# Altium PCB jfino-hw.PcbDoc
Units mm, origin at the board's own origin, x right, y up, seen from the top; angles counter-clockwise.
Board outline 100 x 100 mm, 2 copper layers (Top Layer, Bottom Layer), stack 1.57 mm thick; 123 components, 90 nets, 385 pads, 95 vias.
Unrouted connection lines stored in the file: 51.
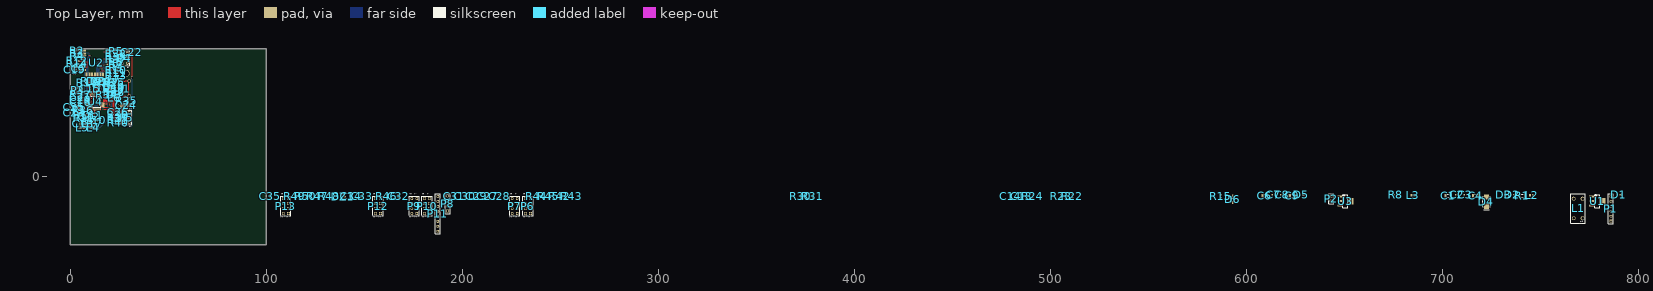
[diagram p0: Top Layer view]
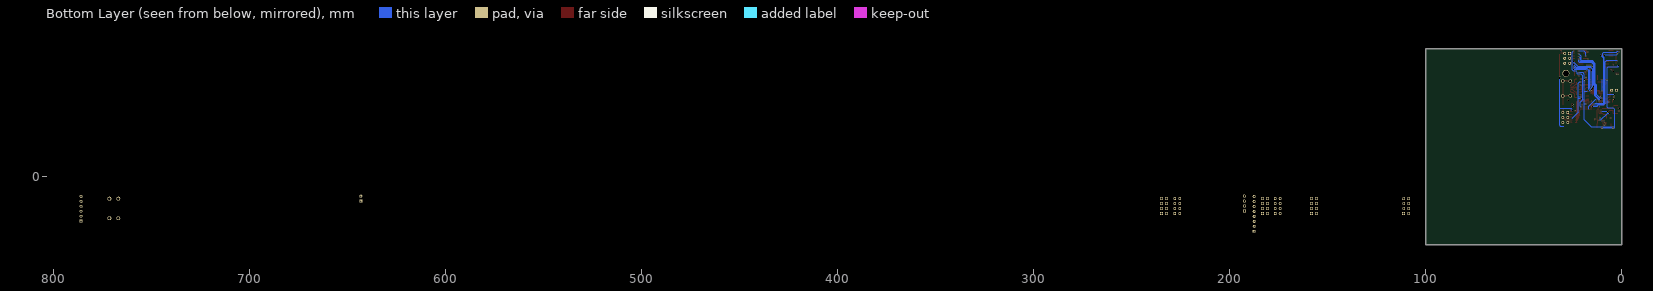
[diagram p1: Bottom Layer view, seen from below]

## Layer stack, top to bottom
Top Solder: solder mask 0.01, Dk 0
Top Layer: signal copper 0.035
Core: core 1.5, Dk 0
Bottom Layer: signal copper 0.035
Bottom Solder: solder mask 0.01, Dk 0

## Board outline
0,65.3 100,65.3 100,-34.7 0,-34.7

## Design rules (kind name [scope] priority, off if disabled: settings)
Clearance Clearance_U4 [(ObjectKind = 'Pad') And (Component = 'U4')] p1: gap=0.24 ignorepadtopadclearanceinfootprint=FALSE
Clearance [All] p2: gap=0.254 ignorepadtopadclearanceinfootprint=FALSE except(0: Arc-Hole Track-Hole SMDPad-Hole THPad-Hole Via-Hole Fill-Hole Poly-Hole Region-Hole Text-Hole)
PolygonConnect [All] p1: connectstyle=Relief reliefconductorwidth=0.254 reliefentries=4 polygonreliefangle="90 Angle" airgapwidth=0.254
RoomDefinition jfino-hw [InComponentClass('jfino-hw')] p1: confinementstyle=ConfineIn formatcopy=TRUE lockcomponents=FALSE outline 101.25,-33.2 791.998,-33.2 791.998,-5.7 101.25,-5.7
RoutingVias [All] p1: holewidth=0.3 width=0.6 viastyle="Through Hole" minholewidth=0.3 minwidth=0.6 maxholewidth=0.3 maxwidth=0.6
SolderMaskExpansion [All] p1: expansion=0.102
Width [All] p1: maxlimit=1 minlimit=0.2 preferedwidth=0.508
30 further rules are at their usual default settings.

## Components (designator, comment, footprint, x,y, rotation, side; value= is the part's Value field where it differs from the comment)
C1 "47uF" 1206_[3216] 702.998,-9.7 r0 top value=10nF
C2 "100nF" 0603_[1608] 707.498,-9.2 r0 top value=10nF
C3 "100nF" 0603_[1608] 711.748,-9.2 r0 top value=10nF
C4 "47uF" 1206_[3216] 716.998,-9.7 r0 top value=10nF
C5 "100nF" 0603_[1608] 4.4,55.1 r90 top value=10nF
C6 "47uF" 1206_[3216] 609.499,-9.7 r0 top value=10nF
C7 "100nF" 0603_[1608] 613.999,-9.2 r0 top value=10nF
C8 "100nF" 0603_[1608] 618.249,-9.2 r0 top value=10nF
C9 "47uF" 1206_[3216] 623.499,-9.7 r0 top value=10nF
C10 "100nF" 0603_[1608] 13.1,28.7 r180 top value=10nF
C11 "100nF" 0603_[1608] 11.4,31.3 r90 top value=10nF
C12 "10uF" 1206_[3216] 9.65,30.55 r90 top value=10nF
C13 "100nF" 0603_[1608] 485.499,-9.95 r90 top value=10nF
C14 "100nF" 0603_[1608] 479.749,-9.95 r90 top value=10nF
C15 "100nF" 0603_[1608] 10.15,45 r270 top value=10nF
C16 "100nF" 0603_[1608] 5.325,38.05 r0 top value=10nF
C17 "10uF" 1206_[3216] 11.1,26.95 r0 top value=10nF
C18 "10uF" 1206_[3216] 6.65,26.95 r180 top value=10nF
C19 "10uF" 1206_[3216] 2.25,54.55 r90 top value=10nF
C20 "100nF" 0603_[1608] 5.325,39.3 r0 top value=10nF
C21 "100nF" 0603_[1608] 5.325,40.55 r0 top value=10nF
C22 "100nF" 0603_[1608] 31.45,63.475 r90 top value=10nF
C23 "6.8pF" 0603_[1608] 2.1,32.75 r90 top value=10nF
C24 "NP" 1808_[4520] 28.47,36.33 r0 top value=10nF
C25 "6.8pF" 0603_[1608] 2.1,35.5 r270 top value=10nF
C26 "100nF" 0603_[1608] 24.6,33 r180 top value=10nF
C27 "100nF" 0603_[1608] 212.999,-9.95 r90 top value=10nF
C28 "100nF" 0603_[1608] 218.999,-9.95 r90 top value=10nF
C29 "100nF" 0603_[1608] 207.249,-9.95 r90 top value=10nF
C30 "100nF" 0603_[1608] 201.499,-9.95 r90 top value=10nF
C31 "100nF" 0603_[1608] 195.999,-9.95 r90 top value=10nF
C32 "100nF" 0603_[1608] 167.499,-9.95 r90 top value=10nF
C33 "100nF" 0603_[1608] 148.999,-9.95 r90 top value=10nF
C34 "100nF" 0603_[1608] 143.249,-9.95 r90 top value=10nF
C35 "100nF" 0603_[1608] 102,-9.95 r90 top value=10nF
D1 "Diode" 0603_[1608]_K1-A2_LED 789.998,-9.2 r0 top
D2 "Diode" 0603_[1608]_K1-A2_LED 735.748,-9.2 r0 top
D3 "LED_5V" 0603_[1608]_K1-A2_LED 731.248,-9.2 r0 top
D4 "SMBJ18A" DO214AA_K1-A2_SMB 722.498,-12.7 r90 top
D5 "LED_3V3" 0603_[1608]_K1-A2_LED 627.999,-9.2 r0 top
D6 "B0520LW" SOD-123 592.999,-11.45 r90 top
D7 "WB_TX" 0603_[1608]_K1-A2_LED 12.5,48.7 r270 top
D8 "WB_RX" 0603_[1608]_K1-A2_LED 14.3,48.7 r270 top
D9 "CG0603MLC-05" 0603_[1608] 22.4,41.7 r180 top
D10 "CG0603MLC-05" 0603_[1608] 22.4,45.6 r180 top
D11 "CPU_LED" 0603_[1608]_K1-A2_LED 17.4,44.75 r90 top
DZ1 "BZX84C3V6LT1G" SOT-23 139,-10.2 r0 top
J1 "Mini USB Type B" USB_MICRO_B_SMD 28.75,45 r90 top
L1 "4mH" WE-CMB-XS 769.248,-16.2 r90 top
L2 "WE742792022" 0805_[2012] 745.498,-9.45 r0 top
L3 "WE742792022" 0805_[2012] 684.998,-9.45 r0 top
L4 "Inductor" 0805_[2012] 11.65,25.05 r180 top
L5 "Inductor" 0805_[2012] 6.1,25.05 r0 top
L6 "WE742792022" 0805_[2012] 22.4,40.25 r180 top
L7 "WE742792022" 0805_[2012] 22.4,49.75 r0 top
P1 "Power IN" HDR1X6 785.998,-22.7 r90 top
P2 "USB_POWER" HEADER_1X2_2.54MM_THD 643.248,-11.2 r90 top
P3 "RESET" HEADER_1X2_2.54MM_THD 3.875,44.1 r0 top
P4 "JLINK" HEADER_2X3_2.54MM_THD 27.85,60.375 r270 top
P5 "ICSP" HEADER_2X3_2.54MM_THD 28.8,30.2 r270 top
P6 "SONAR_VCC" HEADER_2X4_2.54MM_THD 233.499,-14.95 r90 top
P7 "IR_L" HEADER_2X4_2.54MM_THD 226.749,-14.95 r90 top
P8 "Header 4" HEADER_1X4_2.54MM_THD 192.499,-13.7 r90 top
P9 "MOT_L" HEADER_2X4_2.54MM_THD 175.499,-14.95 r90 top
P10 "MOT_R" HEADER_2X4_2.54MM_THD 181.999,-14.95 r90 top
P11 "IMU" HEADER_1X8_2.54MM_THD 187.499,-18.95 r90 top
P12 "IR_M" HEADER_2X4_2.54MM_THD 156.999,-14.95 r90 top
P13 "IR_R" HEADER_2X4_2.54MM_THD 110,-14.95 r90 top
R1 "0R012" 1206_[3216] 740.748,-9.7 r0 top value=1K
R2 "33R" 0603_[1608] 3.5,64.3 r0 top value=1K
R3 "33R" 0603_[1608] 3.5,62.9 r0 top value=1K
R4 "33R" 0603_[1608] 3.5,61.5 r0 top value=1K
R5 "33R" 0603_[1608] 23.425,64.05 r0 top value=1K
R6 "33R" 0603_[1608] 23.4,58.45 r0 top value=1K
R7 "33R" 0603_[1608] 23.4,57.05 r0 top value=1K
R8 "1k" 0603_[1608] 676.248,-9.2 r0 top value=1K
R9 "33R" 0603_[1608] 23.4,55.65 r0 top value=1K
R10 "33R" 0603_[1608] 23.4,54.25 r0 top value=1K
R11 "47k" 0603_[1608] 23.4,52.875 r180 top value=1K
R12 "NP" 0603_[1608] 3.65,59.05 r0 top value=1K
R13 "NP" 0603_[1608] 23.4,51.5 r180 top value=1K
R14 "47k" 0603_[1608] 3.65,57.65 r0 top value=1K
R15 "1k" 0603_[1608] 586.999,-9.95 r90 top value=1K
R16 "NP" 0603_[1608] 7.15,31.45 r180 top value=1K
R17 "1k" 0603_[1608] 8.7,48.05 r0 top value=1K
R18 "1k" 0603_[1608] 17.95,48.05 r180 top value=1K
R19 "NP" 0603_[1608] 10.9,48.75 r270 top value=1K
R20 "NP" 0603_[1608] 15.9,48.75 r270 top value=1K
R21 "NP" 0603_[1608] 7.2,29.9 r0 top value=1K
R22 "39k" 0603_[1608] 511.249,-9.95 r90 top value=1K
R23 "39k" 0603_[1608] 505.499,-9.95 r90 top value=1K
R24 "10k" 0603_[1608] 490.999,-9.95 r90 top value=1K
R25 "NP" 0603_[1608] 22.4,48.2 r180 top value=1K
R26 "NP" 0603_[1608] 22.4,46.9 r0 top value=1K
R27 "47k" 0603_[1608] 5.325,41.8 r180 top value=1K
R28 "33R" 0603_[1608] 22.4,43 r180 top value=1K
R29 "33R" 0603_[1608] 22.4,44.3 r180 top value=1K
R30 "NP" 0603_[1608] 372.749,-9.95 r90 top value=1K
R31 "NP" 0603_[1608] 378.749,-9.95 r90 top value=1K
R32 "33R" 0603_[1608] 23.4,62.675 r0 top value=1K
R33 "33R" 0603_[1608] 23.4,61.275 r0 top value=1K
R34 "470R" 0603_[1608] 18.7,41.85 r90 top value=1K
R35 "NP" 0805_[2012] 28.75,38.85 r180 top value=1K
R36 "NP" 0603_[1608] 6.65,34 r90 top value=1K
R37 "33R" 0603_[1608] 23.4,59.85 r0 top value=1K
R38 "33R" 0603_[1608] 24.6,31.6 r0 top value=1K
R39 "33R" 0603_[1608] 24.6,30.2 r0 top value=1K
R40 "33R" 0603_[1608] 24.6,27.4 r0 top value=1K
R41 "33R" 0603_[1608] 24.6,28.8 r180 top value=1K
R42 "NP" 0603_[1608] 249.749,-9.95 r90 top value=1K
R43 "0R" 0603_[1608] 255.749,-9.95 r90 top value=1K
R44 "0R" 0603_[1608] 237.999,-9.95 r90 top value=1K
R45 "0R" 0603_[1608] 243.999,-9.95 r90 top value=1K
R46 "330R" 0603_[1608] 161.499,-9.95 r90 top value=1K
R47 "0R" 0603_[1608] 126.25,-9.95 r90 top value=1K
R48 "0R" 0603_[1608] 132,-9.95 r90 top value=1K
R49 "NP" 0603_[1608] 114.5,-9.95 r90 top value=1K
R50 "NP" 0603_[1608] 120.25,-9.95 r90 top value=1K
U1 "LM7805" SOT-223 778.998,-12.45 r0 top
U2 "DW1000" DWM1000 6.75,51.95 r0 top
U3 "LM1117-3V3" SOT-223 650.498,-12.45 r0 top
U4 "SAMD21G" LQFP-48_7x7MM_0.5MM 12.75,38.3 r90 top
Y1 "32.768kHz-SMD" CRYSTAL_4X1.5MM_2P_SMD 4.2,34.05 r270 top

## Footprints (in the part's own frame and the unit in brackets; to place one, negate y for a bottom-side part, rotate by r counter-clockwise, add the part's x,y. Pads: shape width x height; smd on the part's side, far side on the other; paste and mask are expansions set on the pad)
0603_[1608] [mm] "Chip Capacitor, Body 1.6x0.8mm, IPC High Density"
  rect 0.8x0.9 smd: 1(-0.7,0) 2(0.7,0)
  body extent -0.75,-0.4 0.75,0.4, height 0.67
0603_[1608]_K1-A2_LED [mm] "SMD led 0603 size"
  rect 0.8x0.9 smd: 1(0.7,0) 2(-0.7,0)
  silkscreen extent 1.5,-0.5 1.5,0.5, body extent -0.8,-0.4 0.8,0.4, height 0.7
0805_[2012] [mm] "Chip Resistor, Body 2.0x1.2mm, IPC High Density"
  rect 1x1.3 smd: 1(-0.8,0) 2(0.8,0)
  body extent -1,-0.6 1,0.6, height 0.62
1206_[3216] [mm] "Chip Capacitor, Body 3.2x1.6mm, IPC High Density"
  rect 1.1x1.7 smd: 1(-1.35,0) 2(1.35,0)
  silkscreen extent -0.4,-0.75 0.4,0.75, body extent -1.7,-0.9 1.7,0.9, height 1.3
1808_[4520] [mm] "Chip Capacitor; Body 4.5 x 2.0 mm (LxW typ)"
  rect 1.8x2.25 smd: 1(-2.075,0) 2(2.075,0)
  silkscreen extent -0.87,-1.02 0.87,1.02, body extent -2.3,-1 2.3,1, height 1.35
CRYSTAL_4X1.5MM_2P_SMD [mm] "smd crystall"
  rect 1.5x1.9 smd: 1(-1.7,0) 2(1.7,0)
  silkscreen extent -2.7,-1.2 2.7,1.2, body extent -2.05,-0.75 2.05,0.75, height 1
DO214AA_K1-A2_SMB [mil]
  rect 103x108 smd: 1(-92.5,0) 2(92.5,0)
  silkscreen extent -167,-79 108,79, body extent -110,-78 110,78, height 106
DWM1000 [mm]
  rect 2.45x1 smd: 1(0,12.35) 2(0,10.95) 3(0,9.55) 4(0,8.15) 5(0,6.75) 6(0,5.35) 7(0,3.95) 8(0,2.55) 17(13,2.55) 18(13,3.95) 19(13,5.35) 20(13,6.75) 21(13,8.15) 22(13,9.55) 23(13,10.95) 24(13,12.35)
  rect 1x2.45 smd: 9(1.6,0) 10(3,0) 11(4.4,0) 12(5.8,0) 13(7.2,0) 14(8.6,0) 15(10,0) 16(11.4,0)
  body extent 0,0 13,23, height 1
HDR1X6 [mm] "Connector; Header; 6 Position"
  rect 1.5x1.5 hole 0.9: 1(0,0)
  round 1.5 hole 0.9: 2(2.54,0) 3(5.08,0) 4(7.62,0) 5(10.16,0) 6(12.7,0)
  silkscreen extent -1.27,-1.27 13.97,1.27
HEADER_1X2_2.54MM_THD [mm] "Connector; Header; 2 Position"
  rect 1.5x1.5 hole 0.9: 1(-1.27,0)
  round 1.5 hole 0.9: 2(1.27,0)
  silkscreen extent -2.54,-1.27 2.54,1.27, body extent -2.54,-1.25 2.44,1.25, height 8.2
HEADER_1X4_2.54MM_THD [mm] "Connector; Header; 4 Position"
  rect 1.5x1.5 hole 0.9: 1(-3.81,0)
  round 1.5 hole 0.9: 2(-1.27,0) 3(1.27,0) 4(3.81,0)
  silkscreen extent -5.08,-1.27 5.08,1.27, body extent -5.08,-1.25 4.98,1.25, height 8.2
HEADER_1X8_2.54MM_THD [mm] "Connector; Header; 8 Position"
  rect 1.5x1.5 hole 0.9: 1(-8.89,0)
  round 1.5 hole 0.9: 2(-6.35,0) 3(-3.81,0) 4(-1.27,0) 5(1.27,0) 6(3.81,0) 7(6.35,0) 8(8.89,0)
  silkscreen extent -10.16,-1.27 10.16,1.27, body extent -10.06,-1.25 10.16,1.25, height 8.2
HEADER_2X3_2.54MM_THD [mm] "pin header 2.54mm 2row 6pin"
  rect 1.5x1.5 hole 0.9: 1(-2.54,-1.27)
  round 1.5 hole 0.9: 2(-2.54,1.27) 3(0,-1.27) 4(0,1.27) 5(2.54,-1.27) 6(2.54,1.27)
  silkscreen extent -3.81,-2.54 3.81,2.54, body extent -3.81,-2.54 3.81,2.54, height 8.54
HEADER_2X4_2.54MM_THD [mm] "pin header 2.54mm 2row 8pin"
  rect 1.5x1.5 hole 0.9: 1(-3.81,-1.27)
  round 1.5 hole 0.9: 2(-3.81,1.27) 3(-1.27,-1.27) 4(-1.27,1.27) 5(1.27,-1.27) 6(1.27,1.27) 7(3.81,-1.27) 8(3.81,1.27)
  silkscreen extent -5.08,-2.6 5.08,2.6, body extent -5.08,-2.54 5.08,2.54, height 8.54
LQFP-48_7x7MM_0.5MM [mm] "Thin QFP, 48-Leads, Body 7x7mm, Pitch 0.5mm, IPC High Density"
  oval 1.55x0.25 smd: 1(-4.025,2.75) 2(-4.025,2.25) 3(-4.025,1.75) 4(-4.025,1.25) 5(-4.025,0.75) 6(-4.025,0.25) 7(-4.025,-0.25) 8(-4.025,-0.75) 9(-4.025,-1.25) 10(-4.025,-1.75) 11(-4.025,-2.25) 12(-4.025,-2.75) 25(4.025,-2.75) 26(4.025,-2.25) 27(4.025,-1.75) 28(4.025,-1.25) 29(4.025,-0.75) 30(4.025,-0.25) 31(4.025,0.25) 32(4.025,0.75) 33(4.025,1.25) 34(4.025,1.75) 35(4.025,2.25) 36(4.025,2.75)
  oval 0.25x1.55 smd: 13(-2.75,-4.025) 14(-2.25,-4.025) 15(-1.75,-4.025) 16(-1.25,-4.025) 17(-0.75,-4.025) 18(-0.25,-4.025) 19(0.25,-4.025) 20(0.75,-4.025) 21(1.25,-4.025) 22(1.75,-4.025) 23(2.25,-4.025) 24(2.75,-4.025) 37(2.75,4.025) 38(2.25,4.025) 39(1.75,4.025) 40(1.25,4.025) 41(0.75,4.025) 42(0.25,4.025) 43(-0.25,4.025) 44(-0.75,4.025) 45(-1.25,4.025) 46(-1.75,4.025) 47(-2.25,4.025) 48(-2.75,4.025)
  silkscreen extent -4.15,-2.85 2.85,3.55, body extent -3.5,-3.5 3.5,3.5, height 1.45
SOD-123 [mm] "SOD-123; 2 Leads; Body 2.7 x 1.6 mm, (LxW)"
  rect 1.6x0.8 smd: 1(1.7,0) 2(-1.7,0)
  silkscreen extent -1.45,-0.85 1.45,0.85, body extent -1.85,-0.8 1.85,0.8, height 1.27
SOT-23 [mm] "SOT23, 3-Leads, Body 2.9x1.3mm, Pitch 0.95mm, Lead Span 2.5mm, IPC High Density"
  rect 0.9x0.65 smd: 1(-1.038,0.95) 2(-1.038,-0.95)
  rect 1.1x0.65 smd: 3(1.038,0)
  silkscreen extent -0.3,-1.6 0.7,1.6, body extent -1.2,-1.52 1.2,1.52, height 1.22
SOT-223 [mm] "SOT223, 4-Leads, Body 6.5x3.5mm, Pitch 2.3mm, Lead Span 7mm, IPC Medium Density"
  rect 2.4x1 smd: 1(-2.9,2.3) 2(-2.9,0) 3(-2.9,-2.3)
  rect 2.4x3.3 smd: 4(2.9,0)
  silkscreen extent -1.25,-3.35 1.25,3.35, body extent -1.85,-3.35 1.85,3.35, height 1.8
USB_MICRO_B_SMD [mm] "Micro USB 2.0 Type B Horizontal"
  rect 0.4x1.35 smd: 1(-1.3,2.51) 2(-0.65,2.51) 3(0,2.51) 4(0.65,2.51) 5(1.3,2.51)
  round 1.75 hole 1.2: Z1(-3.725,2.51) Z2(3.725,2.51) Z3(-3.825,-1.295) Z4(3.825,-1.295)
  silkscreen extent -2.18,1.49 -1.9,1.77, body extent -4,-3.69 4,2.92, height 2.82
WE-CMB-XS [mm]
  round 2 hole 1.27: 1(-5,-2.25) 2(-5,2.25) 3(5,2.25) 4(5,-2.25)
  silkscreen extent -7.5,-3.75 7.5,3.75, body extent -6.9,-3.75 6.9,3.75, height 16.22

## Part data
C1 C2 C3 C4 C5 C6 C7 C8 C9 C10 C11 C12 C13 C14 C15 C16 C17 C18 C19 C20 C21 C22 C23 C24 C25 C26 C27 C28 C29 C30 C31 C32 C33 C34 C35: library part Cap, "Capacitor", Published=8-Jun-2000, Publisher="Altium Limited", Revision="July-2002: Re-released for DXP Platform."
D1: "10A"
D3 D5 D7 D8 D11: library part LED, "Multicolor LED"
D4 D9 D10: library part TVS
D6: library part Diode
DZ1: library part ZENER_BZX
J1: library part USB_Con_Type_B_mini_THD_vert, "Mini USB THD Type B 5 Contacts Vertical", Manufacturer="Würth Elektronik eiSos GmbH", partNo=65100516121, ComponentLink1 Description=Manufacturer, ComponentLink1URL=http://www.we-online.de, ComponentLink2 Description=Datasheet, ComponentLink2URL=http://katalog.we-online.de/em/datasheet/65100516121.pdf, Created by="Karrer Zheng", Created Date=10/10/2014, NoPins=5
L1: library part Common_mode_choke, "WE 744821240"
L2 L3 L6 L7: library part Inductor
P1: library part "Header 6", "Header, 6-Pin", LatestRevisionDate=17-Jul-2002, LatestRevisionNote="Re-released for DXP Platform.", Publisher="Altium Limited"
P2 P3: library part "Header 2", "Header, 2-Pin", LatestRevisionDate=17-Jul-2002, LatestRevisionNote="Re-released for DXP Platform.", Publisher="Altium Limited"
P4 P5: library part "Header 3X2", "Header, 3-Pin, Dual row", LatestRevisionDate=17-Jul-2002, LatestRevisionNote="Re-released for DXP Platform.", Publisher="Altium Limited"
P6 P7 P12 P13: library part "Header 3", "Header, 3-Pin", LatestRevisionDate=17-Jul-2002, LatestRevisionNote="Re-released for DXP Platform.", Publisher="Altium Limited"
P8: "Header, 4-Pin", LatestRevisionDate=17-Jul-2002, LatestRevisionNote="Re-released for DXP Platform.", Publisher="Altium Limited"
P9 P10: library part "Header 4X2", "Header, 4-Pin, Dual row", LatestRevisionDate=17-Jul-2002, LatestRevisionNote="Re-released for DXP Platform.", Publisher="Altium Limited"
P11: library part "Header 8", "Header, 8-Pin", LatestRevisionDate=17-Jul-2002, LatestRevisionNote="Re-released for DXP Platform.", Publisher="Altium Limited"
R1 R2 R3 R4 R5 R6 R7 R8 R9 R10 R11 R12 R13 R14 R15 R16 R17 R18 R19 R20 R21 R22 R23 R24 R25 R26 R27 R28 R29 R30 R31 R32 R33 R34 R35 R36 R37 R38 R39 R40 R41 R42 R43 R44 R45 R46 R47 R48 R49 R50: library part Res1, "Resistor", Published=8-Jun-2000, Publisher="Altium Limited", Revision="July-2002: Re-released for DXP Platform."
U1: case=THD
U3: library part LM1117-FIXED-OUT, "LM1117 LDO Fixed output"
Y1: "Crystal 32.768kHz SMD 2-Pin", Part Number="Aker C2E-24.000-12-3030-X", Purchase Code="RS 671-9564"

## Free pads (board coordinates)
  round 3.5 hole 3.1: 2(28.5,52.7)

## Via types
v1: diameter 0.6, hole 0.3, Top Layer to Bottom Layer, tented both sides, 95 vias

## Nets (pads, with @x,y where several pads share a name; then routed paths per layer and width w, separated by ;. In a path a pad name is that pad's centre, name@x,y a point inside that pad or via, vN(x,y) a via of type N, cw(c..) or ccw(c..) an arc to the next point about the centre after c; other vN are vias at no path point)
+3V3: C8.2 C9.2 C22.1 C26.1 C30.1 D5.2 L5.2 P4.2 P5.2 P6.1 R30.2 R31.2 R43.2 U3.2 U3.4 | length 56.8
  Top Layer w0.508: v1(25.15,33.75) 25.15,33.05 25.75,33.05 26.05,33.35 26.05,34.25 26.425,34.625 29.575,34.625 29.92,34.28 P5.2@29.92,32.79 ; P4.2 C22.1@31.085,62.915 ; v1(31.65,50.25) v1(31.65,50.95) C22.1@31.65,62.55
  Bottom Layer w0.508: v1(25.15,33.75) 25.15,34.25 25.55,34.65 31.65,34.65 ; 29.55,25.55 30.25,25.55 31.025,25.55 31.65,26.175 31.65,34.65 ; v1(31.65,50.95) v1(31.65,50.25) 31.65,34.65
+3V3_A: C10.2 C17.2 L4.1 R16.2 U4.6 | length 17.3
  Top Layer w0.2: C10.2@12.25,28.55 C10.2@12.3,28.6 ; C10.2@12.25,28.75 12.5,29 U4.6
  Top Layer w0.4: R16.2@6.3,31.5 v1(6.3,32.2) ; v1(11.55,28.75) C10.2@12.25,28.75
  Top Layer w0.508: C17.2@12.25,27.15 12.25,28.55 C10.2@12.25,28.75 ; L4.1 C17.2
  Bottom Layer w0.508: v1(6.3,32.2) 7.475,32.2 10.925,28.75 v1(11.55,28.75)
+3V3_D: C5.2 C14.2 C15.2 C16.2 C18.2 C19.2 D11.2 L4.2 L5.1 R11.2 R12.2 R19.1 R20.1 R27.2 U2.5 U2.6 U2.7 U4.17 U4.36 U4.44 | length 147.1
  Top Layer w0.2: v1(6.546,38.1) 7.096,37.55 U4.44 ; U4.36 C15.2@10,44.35 ; U4.17 18.8,37.55
  Top Layer w0.508: C19.2@1.675,56.1 v1(1.675,56.8) ; C19.2 4.2,55.9 4.25,55.85 6.7,55.85 U2.7 8.3,55.9 8.55,56.15 8.55,57.3 ; v1(3.775,41.85) R27.2@4.475,41.85 ; R12.2@4.2,58.946 U2.5@6.354,58.946 ; v1(4.5,24.75) L5.1@5.2,24.75 ; v1(4.5,25.35) L5.1@5.2,25.35 ; L5.1 C18.2 ; C16.2@5.875,38.1 v1(6.546,38.1) ; U2.6 8.55,57.3 ; U2.5 8.3,58.7 8.55,58.45 8.55,57.3 ; v1(7.5,49.5) R19.1@10.75,49.5 ; v1(10.05,24.75) L4.2@10.75,24.75 ; v1(10.05,25.35) L4.2@10.75,25.35 ; R20.1@15.75,49.5 v1(19,49.5) ; v1(17.25,43.4) D11.2@17.25,44.1 ; v1(18.1,37.05) 18.8,37.05 ; v1(21.85,52.925) R11.2@22.55,52.925
  Bottom Layer w0.508: v1(1.675,56.8) 1.675,56.2 1.95,55.925 7.05,55.925 7.5,55.475 v1(7.5,49.5) 7.5,41.85 ; v1(3.775,41.85) 7.5,41.85 ; v1(6.546,38.1) 7.475,38.1 7.5,38.125 ; v1@10,43.591 v1(10.025,43.616) v1(10.025,49.525) ; v1(17.25,43.4) 18.9,43.4 19,43.5 ; v1(18.1,37.05) 19,37.05 ; v1(21.85,52.925) 19.6,52.925 19,52.325 v1(19,49.5) 19,43.5 ; 3.675,25.05 9.75,25.05 v1(10.05,25.35) ; 3.675,25.05 3.675,25.35 ; 3.675,25.05 3.675,24.75 v1(4.5,24.75) v1(10.05,24.75) v1(10.05,25.35) ; 3.675,25.35 3.675,34.375 4.325,35.025 7,35.025 7.5,35.525 7.5,36.9 7.5,38.125 ; 3.675,25.35 v1(4.5,25.35) v1(10.05,25.35) ; 7.5,38.125 7.5,41.85 ; v1(10.05,25.35) 15.4,25.35 19,28.95 19,37.05 ; 19,37.05 19,43.5
+5V: C6.2 C7.2 C29.1 C32.1 C33.1 C35.1 D2.1 D3.2 P2.2 P6.3 P7.1 P11.1 P12.1 P13.1 R42.2 U3.3
+VMOT: C27.1 C28.1 P9.7 P10.7 R42.1 R43.1
GND: C1.1 C2.1 C3.1 C4.1 C5.1 C6.1 C7.1 C8.1 C9.1 C10.1 C11.1 C12.1 C13.1 C14.1 C15.1 C16.1 C17.1 C18.1 C19.1 C20.1 C21.1 C22.2 C23.2 C24.1 C25.2 C26.2 C27.2 C28.2 C29.2 C30.2 C31.2 C32.2 C33.2 C34.2 C35.2 D9.2 D10.2 DZ1.1 L3.2 L7.1 P3.1 P4.4 P4.6 P5.6 P7.3 P8.4 P9.8 P10.8 P11.3 P12.3 P13.3 R8.1 R13.2 R14.2 R15.1 R17.1 R18.1 R21.1 R24.1 R26.1 R35.2 R49.1 R50.1 U1.2 U1.4 U2.8 U2.16 U2.21 U2.23 U2.24 U3.1 U4.5 U4.18 U4.35 U4.42 | length 47.9
  Top Layer w0.2: U4.42 v1(10,38.55) ; U4.35 10.5,41.425 v1(11,40.925) ; v1(11.5,35.675) 12,35.175 U4.5 ; v1(15.375,38.55) 15.875,38.05 U4.18 ; U2.16@18,51.95 18.226,52.176 18.226,53.3 18.326,53.4 v1(18.7,53.4)
  Top Layer w0.4: v1(1.25,33.5) C23.2@1.95,33.5 ; v1(1.25,34.85) C25.2@1.95,34.85 ; v1(1.75,52.3) C19.1@1.75,53 ; v1(2.75,52.3) C19.1@2.75,53 ; v1(3.775,39.35) 4.475,39.35 C16.1@4.475,38.1 ; v1(3.775,40.6) C21.1@4.475,40.6 ; v1(4.2,57) R14.2@4.2,57.7 ; v1(4.25,53.75) C5.1@4.25,54.45 ; v1(5.25,54.5) U2.8@5.95,54.5 ; v1(5.6,29.95) R21.1@6.3,29.95 ; C18.1@7.9,26.35 v1(8.95,26.35) C17.1@9.65,26.35 ; C18.1@7.9,27.55 v1(8.95,27.55) C17.1@9.65,27.55 ; C18.1@7.95,26.95 v1(8.65,26.95) C17.1@9.7,26.95 ; R17.1@8.025,48.1 8.025,47.443 8.925,46.542 8.925,45.75 C15.1@10,45.75 ; v1(9,28.35) C12.1@9,29.05 ; v1(10,28.35) C12.1@10,29.05 ; v1(11.25,29.95) C11.1@11.25,30.65 ; C10.1@13.65,28.75 v1(13.65,29.45) ; v1(17.25,60.1) U2.21 ; v1(17.25,63.6) 17.95,63.6 ; v1(18.15,50.45) U2.16@18.15,51.15 ; R18.1@18.5,48.1 19.5,48.1 19.85,48.45 19.85,49.425 20.225,49.8 v1(20.75,49.8) L7.1@21.45,49.8 ; U2.23 18.2,62.9 17.95,63.15 17.95,63.6 ; U2.24 18.2,64.3 17.95,64.05 17.95,63.6 ; v1(20.85,41.75) D9.2@21.55,41.75 ; v1(20.85,46.95) 21.55,46.95 D10.2@21.55,45.65 ; v1(21.851,51.503) 22.502,51.503 R13.2@22.55,51.55 ; C26.2@23.75,33.05 v1(23.75,33.75) ; v1(25.025,35.9) C24.1@25.725,35.9 ; v1(25.025,36.9) C24.1@25.725,36.9 ; v1(27.1,38.9) R35.2@27.8,38.9 ; v1(30.75,64.15) C22.2@31.45,64.15
NetC3_2: C3.2 C4.2 D2.2 U1.3
NetC11_2: C11.2 C12.2 R16.1 R21.2 U4.4 | length 7.8
  Top Layer w0.2: C11.2@11.25,32.05 11.5,32.3 U4.4
  Top Layer w0.4: R21.2@7.7,29.85 7.7,29.95 R16.1@7.7,31.6 ; R16.1@7.7,31.65 C12.2@9.15,31.65 ; C12.2@9.15,31.6 9.5,31.95 9.6,32.05 C11.2@11.25,32.05
NetC13_2: C13.2 R22.1 R23.2 R24.2
NetC20_2: C20.2 U4.43 | length 3.4
  Top Layer w0.2: C20.2@5.875,39.35 6.475,39.35 7.775,38.05 U4.43
NetC21_2: C21.2 P3.2 R27.1 R37.1 R40.1 U4.40 | length 63.7
  Top Layer w0.2: P3.2@4.995,44.15 5.875,43.27 R27.1@5.875,41.55 ; R27.1@5.875,41.85 5.875,40.6 6.725,40.6 7.775,39.55 9.625,39.55 v1(10.125,40.05) 11.95,40.05 v1(12.75,39.25) ; v1(16.725,34.3) 21.1,34.3 21.496,33.904 21.496,31.478 22.042,30.932 22.042,30.074 22.496,29.62 22.496,28.962 22.95,28.508 22.95,27.75 23.25,27.45 R40.1@23.75,27.45
  Top Layer w0.4: v1(21.85,62.725) 22.55,62.725
  Bottom Layer w0.2: v1(10.125,40.05) 11.05,40.05 12.742,41.742 12.742,46.626 13.413,47.297 13.413,57.619 14.827,59.033 20.333,59.033 20.646,59.346 20.646,61.521 v1(21.85,62.725) ; v1(12.75,39.25) 13.45,39.25 16.725,35.975 v1(16.725,34.3)
NetC23_1: C23.1 R36.1 U4.1 Y1.2 | length 10.8
  Top Layer w0.2: C23.1@1.95,32.1 3.95,32.1 Y1.2 4.2,33.3 4.45,33.55 R36.1@6.3,33.55 ; v1(10.5,33.125) 10.5,34.275 10.5,34.4
  Top Layer w0.4: R36.1@6.5,33.175 v1(7.2,33.175)
  Bottom Layer w0.2: v1(7.2,33.175) 10.45,33.175 v1(10.5,33.125)
NetC24_2: C24.2 J1.Z1 J1.Z2 R35.1 | length 20.3
  Top Layer w0.508: J1.Z1@25.99,41.325 26.09,41.325 28.175,41.325 28.375,41.125 29.895,41.125 ; J1.Z2@25.99,48.775 26.09,48.775 28.175,48.775 28.375,48.975 29.895,48.975 29.895,48.875 29.895,41.125 ; C24.2@29.895,36.68 29.895,41.125
NetC25_1: C25.1 R36.2 U4.2 Y1.1 | length 9.1
  Top Layer w0.2: C25.1@1.95,36.25 Y1.1@3.95,36.25 ; Y1.1 4.2,34.8 4.45,34.55 6.3,34.55 R36.2@6.5,34.75 ; R36.2@6.35,34.6 10,34.6
NetC31_1: C31.1 P6.2 P8.1
NetC34_1: C34.1 DZ1.3 R46.2 U4.15
NetD1_1: D1.1 R1.2
NetD1_2: D1.2 P1.1
NetD3_1: D3.1 R8.2
NetD4_1: D4.1 L1.1 P1.3 P1.5 R1.1
NetD4_2: D4.2 L1.4 P1.2 P1.4 P1.6
NetD5_1: D5.1 R15.2
NetD6_1: D6.1 P2.1
NetD7_1: D7.1 R17.2 R19.2 | length 3
  Top Layer w0.4: R17.2@9.25,48.1 9.425,48.1 10.75,48.1 D7.1@12.25,48.1
NetD7_2: D7.2 U2.12 | length 2.3
  Top Layer w0.4: D7.2@12.35,49.45 U2.12@12.35,51.75
NetD8_1: D8.1 R18.2 R20.2 | length 3
  Top Layer w0.4: D8.1@14.25,48.1 17.1,48.1 R18.2@17.25,48.1
NetD8_2: D8.2 U2.13 | length 2.3
  Top Layer w0.4: D8.2@14.15,49.45 U2.13@14.15,51.75
NetD9_1: D9.1 J1.2 R28.1 | length 5
  Top Layer w0.2: D9.1@22.95,41.75 22.95,43.05 23.65,43.05 25,44.4 J1.2@26.09,44.4
NetD10_1: D10.1 J1.3 R29.1 | length 4.7
  Top Layer w0.2: R29.1@22.95,44.35 22.95,45.65 23.75,45.65 24.35,45.05 J1.3@26.09,45.05
NetD11_1: D11.1 R34.2 | length 3.8
  Top Layer w0.2: D11.1@17.25,45.3 18.2,45.3 18.55,44.95 R34.2@18.55,42.6
NetJ1_1: J1.1 L6.1 | length 5.6
  Top Layer w0.4: L6.1@23.05,40.3 23.75,40.3 24.05,40.6 24.05,42.15 24.65,42.75 25.45,42.75 26.09,43.39 J1.1@26.09,43.75
NetJ1_4: J1.4 R25.1 R26.2 | length 5
  Top Layer w0.2: R26.2@22.95,46.95 23.75,46.95 25,45.7 J1.4@26.09,45.7
  Top Layer w0.4: R26.2@22.95,46.95 R25.1@22.95,48.25
NetJ1_5: J1.5 L7.2 | length 5.6
  Top Layer w0.4: L7.2@23.05,49.8 23.75,49.8 24.05,49.5 24.05,47.95 24.65,47.35 25.45,47.35 26.09,46.71 J1.5@26.09,46.35
NetL1_2: L1.2 L2.1
NetL1_3: L1.3 L3.1
NetP4_1: P4.1 R32.2 | length 2.6
  Top Layer w0.4: R32.2@23.96,62.915 P4.1
NetP4_3: P4.3 R33.2 | length 3.1
  Top Layer w0.4: R33.2@23.95,61.525 25.43,61.525 P4.3
NetP4_5: P4.5 R37.2 | length 4.4
  Top Layer w0.4: R37.2@23.95,60.1 24.9,60.1 25.45,59.55 25.45,58.05 25.665,57.835 P4.5
NetP5_1: P5.1 R38.2 | length 3.2
  Top Layer w0.2: R38.2@25.15,31.65 27.15,31.65 27.38,31.88 P5.1@27.38,32.79
NetP5_3: P5.3 R39.2 | length 2.2
  Top Layer w0.2: R39.2@25.15,30.25 P5.3@27.38,30.25
NetP5_4: P5.4 R41.1 | length 5.4
  Top Layer w0.2: R41.1@25.15,28.85 28.52,28.85 P5.4@29.92,30.25
NetP5_5: P5.5 R40.2 | length 2.3
  Top Layer w0.2: R40.2@25.15,27.45 25.41,27.71 P5.5@27.38,27.71
NetP7_2: P7.2 U4.9 | length 0
  Top Layer w0.2: U4.9 U4.9@14.035,34.24
NetP8_2: P8.2 U4.48
NetP8_3: P8.3 U4.16
NetP9_1: P9.1 U4.29
NetP9_2: P9.2 U4.30
NetP9_3: P9.3 P9.4 P10.3 P10.4 U4.11
NetP9_5: P9.5 R44.1
NetP9_6: P9.6 R47.1
NetP10_1: P10.1 U4.24
NetP10_2: P10.2 U4.23
NetP10_5: P10.5 R45.1
NetP10_6: P10.6 R48.1
NetP11_4: P11.4 R31.1 U4.32
NetP11_5: P11.5 R30.1 U4.31
NetP11_7: P11.7 U4.37
NetP11_8: P11.8 U4.38
NetP12_2: P12.2 U4.10 | length 0
  Top Layer w0.2: U4.10 U4.10@14.535,34.24
NetP13_2: P13.2 U4.47
NetR2_1: R2.1 U4.14 | length 44.7
  Top Layer w0.2: v1(14.55,36.55) 15.1,36.55 15.6,36.05 U4.14
  Top Layer w0.4: v1(1.35,63.75) 1.7,64.1 R2.1@2.8,64.1
  Bottom Layer w0.2: v1(1.35,63.75) 2.45,63.75 2.9,63.3 9.454,63.3 9.804,62.95 9.804,61.675 8.796,60.667 8.796,37.662 9.612,36.846 12.321,36.846 12.617,36.55 v1(14.55,36.55)
NetR2_2: R2.2 U2.1 | length 2.5
  Top Layer w0.4: R2.2 U2.1
NetR3_1: R3.1 U4.22 | length 42.3
  Top Layer w0.2: v1(8.9,61.9) v1(10.7,61.9) ; v1(14.075,37.3) 15.075,37.3 15.825,36.55 16.775,36.55
  Top Layer w0.4: v1(2.1,62.7) R3.1@2.8,62.7
  Bottom Layer w0.2: v1(2.1,62.7) 2.9,61.9 v1(8.9,61.9) ; v1(10.7,61.9) 9.25,60.45 9.25,37.85 9.8,37.3 v1(14.075,37.3)
NetR3_2: R3.2 U2.2 | length 2.5
  Top Layer w0.4: R3.2 U2.2
NetR4_1: R4.1 R12.1 R14.1 U4.12 | length 41.1
  Top Layer w0.2: v1(15,35.675) 15.5,35.175 U4.12
  Top Layer w0.4: v1(2.1,59.1) R12.1@2.8,59.1 ; R14.1@2.8,57.7 R12.1@2.8,59.1 ; R4.1 R12.1@2.8,59.1
  Bottom Layer w0.2: v1(2.1,59.1) 7.85,59.1 8.342,58.608 8.342,37.474 9.424,36.392 12.133,36.392 12.85,35.675 v1(15,35.675)
NetR4_2: R4.2 U2.3 | length 2.5
  Top Layer w0.4: R4.2 U2.3
NetR5_1: R5.1 U2.22 | length 7.1
  Top Layer w0.4: v1(18.25,61.5) U2.22@18.95,61.5 ; v1(21.875,64.1) R5.1@22.575,64.1
  Bottom Layer w0.2: v1(18.25,61.5) 18.25,63.15 19.2,64.1 v1(21.875,64.1)
NetR5_2: R5.2 U4.13 | length 38.3
  Top Layer w0.2: U4.13 v1(20.7,35.55)
  Top Layer w0.4: R5.2@23.975,64.1 v1(24.675,64.1)
  Bottom Layer w0.2: v1(20.7,35.55) 21.125,35.975 21.125,37.95 19.925,39.15 19.925,51.5 20.65,52.225 22.388,52.225 22.65,52.487 22.65,53.375 22.95,53.675 24.55,53.675 25.325,54.45 25.325,63.45 v1(24.675,64.1)
NetR6_1: R6.1 U2.20 | length 2.8
  Top Layer w0.4: U2.20@19.75,58.5 R6.1@22.55,58.5
NetR6_2: R6.2 U4.26 | length 26.1
  Top Layer w0.2: U4.26@15,42.1 U4.26@15,42.125 ; U4.26@15,42.625 15,43.9 v1(15.5,44.4) ; v1(15.075,56.15) 15.55,56.15 16.2,55.5 v1(16.2,54.825)
  Top Layer w0.4: R6.2@23.95,58.7 v1(24.65,58.7)
  Bottom Layer w0.2: v1(15.075,56.15) 22.1,56.15 v1(24.65,58.7) ; v1(15.5,44.4) 16.2,45.1 v1(16.2,54.825)
NetR7_1: R7.1 U2.19 | length 2.8
  Top Layer w0.4: U2.19 R7.1@22.55,57.3
NetR7_2: R7.2 U4.28 | length 24.6
  Top Layer w0.2: U4.28@14,42.125 U4.28 14,45.375 v1(14.5,45.875)
  Top Layer w0.4: R7.2@23.95,57.3 v1(24.65,57.3)
  Bottom Layer w0.2: v1(14.5,45.875) 14.775,46.15 14.775,54.8 15.575,55.6 22.95,55.6 v1(24.65,57.3)
NetR9_1: R9.1 U2.18 | length 2.8
  Top Layer w0.4: U2.18 R9.1@22.55,55.9
NetR9_2: R9.2 U4.25 | length 21.7
  Top Layer w0.2: U4.25 15.5,43.15 v1(16,43.65)
  Top Layer w0.4: R9.2@23.95,55.9 v1(24.65,55.9)
  Bottom Layer w0.2: v1(16,43.65) 16.9,44.55 16.9,54.337 17.538,54.975 23.325,54.975 24.25,55.9 v1(24.65,55.9)
NetR10_1: R10.1 U2.17 | length 2.8
  Top Layer w0.4: U2.17 R10.1@22.55,54.5
NetR10_2: R10.2 R11.1 R13.1 U4.27 | length 25.9
  Top Layer w0.2: U4.27@14.5,42.125 U4.27 14.5,43.85 ; 14.5,43.35 14.5,44.625 v1(15,45.125) ; v1(15.475,54.075) v1(17.65,54.075) ; R13.1@23.95,51.55 23.95,53.05 R10.2@23.95,54.5
  Top Layer w0.4: R10.2@23.95,54.7 v1(24.65,54.7)
  Bottom Layer w0.2: v1(15,45.125) 15.475,45.6 v1(15.475,54.075) ; v1(17.65,54.075) 18.075,54.5 23.875,54.5 24.075,54.7 v1(24.65,54.7)
NetR23_1: R23.1 U4.3
NetR28_2: R28.2 U4.33 | length 16.1
  Top Layer w0.2: U4.33 11.5,43.225 11.747,43.472 13.16,43.472 13.575,43.887 13.575,45.925 14.192,46.542 19.458,46.542 20.25,45.75 20.25,43.775 20.975,43.05 R28.2@21.55,43.05
NetR29_2: R29.2 U4.34 | length 16.1
  Top Layer w0.2: U4.34 11,43.35 11.522,43.872 12.995,43.872 13.175,44.052 13.175,46.091 14.026,46.942 19.624,46.942 20.65,45.916 20.65,44.584 20.884,44.35 R29.2@21.55,44.35
NetR32_1: R32.1 U4.46 | length 33.9
  Top Layer w0.2: U4.46 10.104,36.55 11.45,37.896 v1(11.45,38.65)
  Top Layer w0.4: v1(21.85,59.9) 22.55,59.9
  Bottom Layer w0.2: v1(11.45,38.65) 11.45,39.008 13.65,41.208 13.65,46.25 14.321,46.921 14.321,57.243 15.203,58.125 21.309,58.125 21.85,58.666 v1(21.85,59.9)
NetR33_1: R33.1 U4.45 | length 34.6
  Top Layer w0.2: U4.45 9.625,37.05 10.75,38.175 v1(10.75,39.35)
  Top Layer w0.4: v1(21.85,61.325) R33.1@22.55,61.325
  Bottom Layer w0.2: v1(10.75,39.35) 11.15,39.35 13.196,41.396 13.196,46.438 13.867,47.109 13.867,57.431 15.015,58.579 20.879,58.579 21.1,58.8 21.1,60.575 v1(21.85,61.325)
NetR34_1: R34.1 U4.41 | length 1.6
  Top Layer w0.2: 16.775,41.05 R34.1@18.35,41.05
NetR38_1: R38.1 U4.21 | length 14
  Top Layer w0.2: U4.21 17.934,39.55 18.426,39.058 22.242,39.058 22.95,38.35 22.95,31.95 23.25,31.65 R38.1@23.75,31.65
NetR39_1: R39.1 U4.20 | length 14.8
  Top Layer w0.2: U4.20 17.792,39.05 18.238,38.604 21.896,38.604 22.45,38.05 22.45,31.808 22.95,31.308 22.95,30.45 23.15,30.25 R39.1@23.75,30.25
NetR41_2: R41.2 U4.19 | length 15.5
  Top Layer w0.2: U4.19 17.65,38.55 18.05,38.15 21.65,38.15 21.95,37.85 21.95,31.666 22.496,31.12 22.496,30.262 22.95,29.808 22.95,29.15 23.25,28.85 R41.2@23.75,28.85
NetR44_2: R44.2 R47.2 R49.2 U4.7
NetR45_2: R45.2 R48.2 R50.2 U4.8
NetR46_1: R46.1
VPWR: C1.2 C2.2 L2.2 R22.2 U1.1
VUSB: D6.2 L6.2 R25.2 | length 26.3
  Top Layer w0.508: v1(20.65,39.85) L6.2@21.35,39.85 ; v1(20.65,40.65) L6.2@21.35,40.65 ; v1(20.85,48.25) R25.2@21.55,48.25
  Bottom Layer w0.508: v1(20.65,39.85) 22.25,39.85 ; v1(20.65,40.65) 22.25,40.65 ; v1(20.85,48.25) 21.65,48.25 22.25,47.65 22.25,40.65 ; 25.5,29.6 22.25,32.85 22.25,39.85 ; 22.25,39.85 22.25,40.65
pads on no net: DZ1.2 J1.Z3 J1.Z4 P6.4 P6.5 P6.6 P6.7 P6.8 P7.4 P7.5 P7.6 P7.7 P7.8 P11.2 P11.6 P12.4 P12.5 P12.6 P12.7 P12.8 P13.4 P13.5 P13.6 P13.7 P13.8 U2.4 U2.9 U2.10 U2.11 U2.14 U2.15 U4.39
copper on no net: | length 0.7
  Top Layer w0.4: v1(20.2,36.55) 20.2,37.25
  other v1: 12.8,38.149 15.6,57.15 16.625,57.15 17.65,57.15

## Text inside footprints (layer, text, board x,y; h text height)
D1: Assembly_TOP "K" at 790.873,-9 h0.5
D2: Assembly_TOP "K" at 736.624,-9 h0.5
D3: Assembly_TOP "K" at 732.124,-9 h0.5
D4: Note_TOP "K" at 722.798,-16.85 h1 r90
D5: Assembly_TOP "K" at 628.874,-9 h0.5
D7: Assembly_TOP "K" at 12.7,47.825 h0.5 r270
D8: Assembly_TOP "K" at 14.5,47.825 h0.5 r270
D11: Assembly_TOP "K" at 17.2,45.625 h0.5 r90
J1: Place_TOP "PCB Edge" at 31.25,43.1 h1 r90
L1: Note_TOP "1" at 772.748,-22.9 h1 r180; Top Overlay "1" at 772.348,-23.4 h2.5 r90
P4: Top Overlay "5" at 26.072,56.203 h1.5 r270; Top Overlay "6" at 28.612,56.203 h1.5 r270; Top Overlay "1" at 26.05,64.925 h1.5 r270; Top Overlay "2" at 28.85,65.125 h1.5 r270
P5: Top Overlay "5" at 27.022,26.028 h1.5 r270; Top Overlay "6" at 29.562,26.028 h1.5 r270; Top Overlay "1" at 27,34.75 h1.5 r270; Top Overlay "2" at 29.8,34.95 h1.5 r270
P6: Top Overlay "7" at 235.177,-9.328 h1.5 r90; Top Overlay "8" at 232.637,-9.328 h1.5 r90; Top Overlay "1" at 235.299,-20.85 h1.5 r90; Top Overlay "2" at 232.499,-21.05 h1.5 r90
P7: Top Overlay "7" at 228.427,-9.328 h1.5 r90; Top Overlay "8" at 225.887,-9.328 h1.5 r90; Top Overlay "1" at 228.549,-20.85 h1.5 r90; Top Overlay "2" at 225.749,-21.05 h1.5 r90
P9: Top Overlay "7" at 177.177,-9.328 h1.5 r90; Top Overlay "8" at 174.637,-9.328 h1.5 r90; Top Overlay "1" at 177.299,-20.85 h1.5 r90; Top Overlay "2" at 174.499,-21.05 h1.5 r90
P10: Top Overlay "7" at 183.677,-9.328 h1.5 r90; Top Overlay "8" at 181.137,-9.328 h1.5 r90; Top Overlay "1" at 183.799,-20.85 h1.5 r90; Top Overlay "2" at 180.999,-21.05 h1.5 r90
P12: Top Overlay "7" at 158.677,-9.328 h1.5 r90; Top Overlay "8" at 156.137,-9.328 h1.5 r90; Top Overlay "1" at 158.799,-20.85 h1.5 r90; Top Overlay "2" at 155.999,-21.05 h1.5 r90
P13: Top Overlay "7" at 111.678,-9.328 h1.5 r90; Top Overlay "8" at 109.138,-9.328 h1.5 r90; Top Overlay "1" at 111.8,-20.85 h1.5 r90; Top Overlay "2" at 109,-21.05 h1.5 r90
U1: Note_TOP "1" at 774.998,-10.95 h1
U3: Note_TOP "1" at 646.498,-10.95 h1